# EAGLE board ScaleBreakoutBoard2.0 (EAGLE 9.6.2)
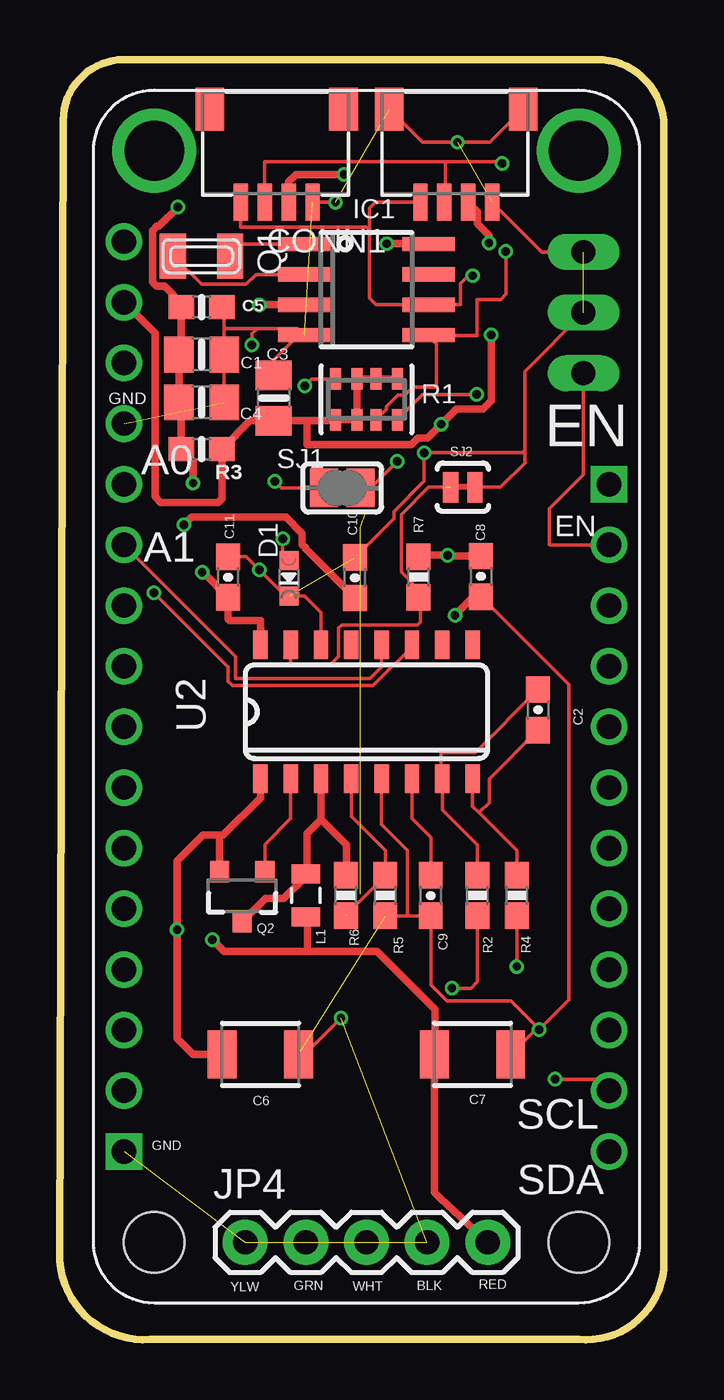
[diagram p0: board, top side]
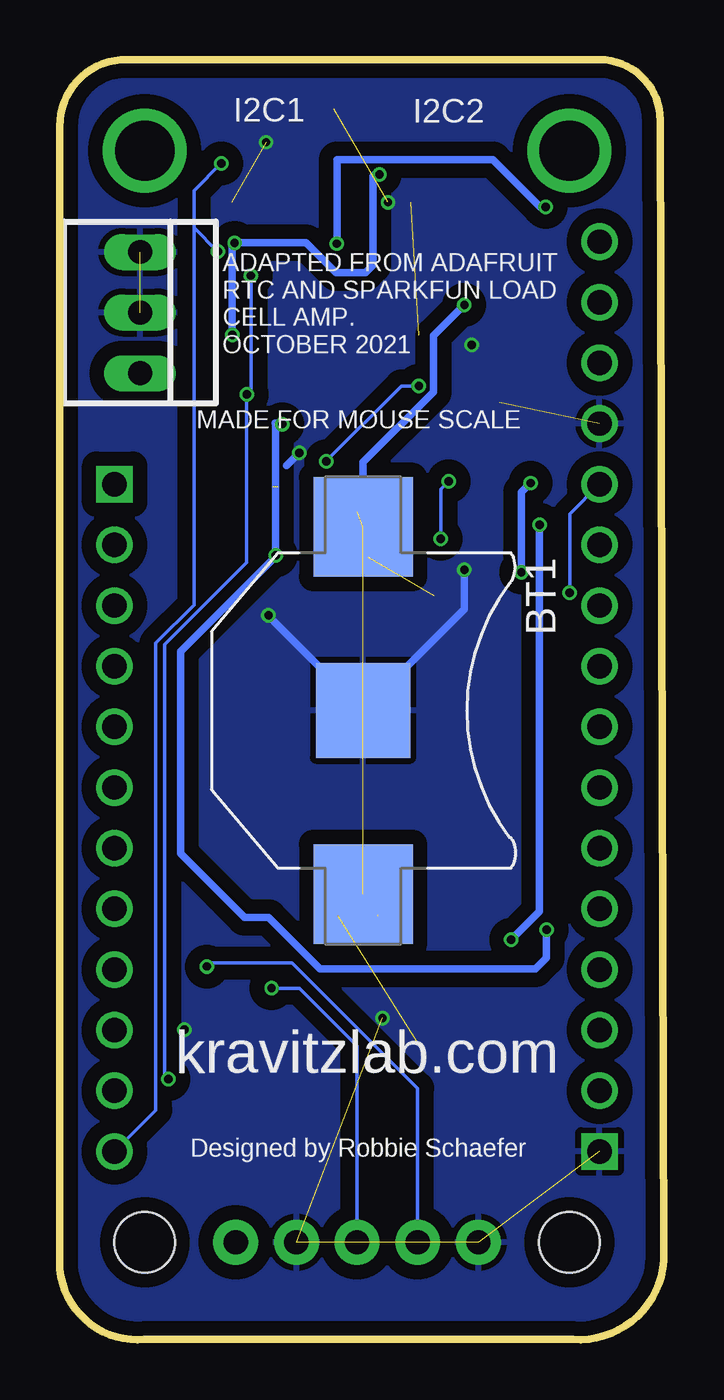
[diagram p1: board, bottom side, seen from below]

Size 25.31 x 53.61 mm. Coordinates in mm from the lower left corner, seen from the top.
Outline: 0.15,51.07 arc-90 2.69,53.61 22.76,53.61 arc-90 25.3,50.56 25.3,2.96 arc-90 21.74,0.01 3.81,0.01 arc-90 0,3.32 0.15,51.07
Copper layers (1*16): Top 0.035559375mm / dielectric 1.6mm / Bottom 0.035559375mm
Design rules "oshpark-2layer": minimum track width 6mil, minimum drill 10mil, track to track 6mil, track to pad 6mil, pad to pad 6mil, via to via 6mil, smd to smd 6mil, copper to edge 15mil, drill to drill 6mil, minimum pad ring 5mil, minimum via ring 5mil, stop-mask expansion 2.5mil, vias tented up to drill 0mil, thermal gap 10mil

## Footprints (pad centres in the part's own frame; a part is rotated, then mirrored left to right if it is on the bottom)
BAT_BK-885 = smd 3.96 x 3.96: - 0,0 | smd 4.17 x 4.17: S1+ -7.685,0; S2+ 7.685,0
0805-NO = smd 1.24 x 1.5: 1 -0.95,0; 2 0.95,0
0603-CAP = smd 1.1 x 1: 1 -0.85,0; 2 0.85,0
0603-NO = smd 1.075 x 1: 1 -0.85,0; 2 0.85,0
1210 = smd 1.2 x 2: 1 -1.6,0; 2 1.6,0
JST_SH4 = smd 0.6 x 1.55: 1 -1.5,2.514; 2 -0.5,2.514; 3 0.5,2.514; 4 1.5,2.514 | smd 1.2 x 1.8: MT1 -2.8,-1.386; MT2 2.8,-1.386
CHIPLED_0603_NOOUTLINE = smd 0.8 x 0.8: A 0,-0.75; C 0,0.75
SOIC8_150MIL = smd 0.6 x 2.2: 1 -1.905,-2.6; 2 -0.635,-2.6; 3 0.635,-2.6; 4 1.905,-2.6; 5 1.905,2.6; 6 0.635,2.6; 7 -0.635,2.6; 8 -1.905,2.6
1X05 = drill 1.016 pad 1.88: 1 0,0; 2 2.54,0; 3 5.08,0; 4 7.62,0; 5 10.16,0
0805 = smd 0.8 x 1.2: 1 -0.9,0; 2 0.9,0
XTAL3215 = smd 1.1 x 1.9: P$1 1.2,0; P$2 -1.2,0
SOT23-3 = smd 0.8 x 0.9: 1 -0.95,-1; 2 0.95,-1; 3 0,1.1
RESPACK_4X0603 = smd 0.45 x 0.9: 1 -1.3,-0.85; 2 -0.4,-0.85; 3 0.4,-0.85; 4 1.3,-0.85; 5 1.3,0.85; 6 0.4,0.85; 7 -0.4,0.85; 8 -1.3,0.85
0603-RES = smd 1.1 x 1: 1 -0.85,0; 2 0.85,0
SOLDERJUMPER_CLOSEDWIRE = smd 1.168 x 1.6: 1 -0.762,0; 2 0.762,0 | smd 0.635 x 0.203: WIRE 0,0
PAD-JUMPER-2-NC_BY_TRACE_YES_SILK = smd 0.635 x 1.27: 1 -0.508,0; 2 0.508,0
MODULE_FEATHER_M0_BASIC_PROTO = drill 1.02 square: P1_1 19.05,-10.16; P2_1 -8.89,10.16 | drill 1.02: P1_2 16.51,-10.16; P1_3 13.97,-10.16; P1_4 11.43,-10.16; P1_5 8.89,-10.16; P1_6 6.35,-10.16; P1_7 3.81,-10.16; P1_8 1.27,-10.16; P1_9 -1.27,-10.16; P1_10 -3.81,-10.16; P1_11 -6.35,-10.16; P1_12 -8.89,-10.16; P1_13 -11.43,-10.16; P1_14 -13.97,-10.16; P1_15 -16.51,-10.16; P1_16 -19.05,-10.16; P2_2 -6.35,10.16; P2_3 -3.81,10.16; P2_4 -1.27,10.16; P2_5 1.27,10.16; P2_6 3.81,10.16; P2_7 6.35,10.16; P2_8 8.89,10.16; P2_9 11.43,10.16; P2_10 13.97,10.16; P2_11 16.51,10.16; P2_12 19.05,10.16 | drill 2.5 pad 3.2: P$1 -22.86,8.89; P$2 -22.86,-8.89 | hole 2.54: 22.86,-8.89; 22.86,8.89
SO16 = smd 0.6 x 1.2: 1 -4.445,-2.8; 2 -3.175,-2.8; 3 -1.905,-2.8; 4 -0.635,-2.8; 5 0.635,-2.8; 6 1.905,-2.8; 7 3.175,-2.8; 8 4.445,-2.8; 9 4.445,2.8; 10 3.175,2.8; 11 1.905,2.8; 12 0.635,2.8; 13 -0.635,2.8; 14 -1.905,2.8; 15 -3.175,2.8; 16 -4.445,2.8
22-23-2031 = drill 1 long: 1 -2.54,0; 2 0,0; 3 2.54,0

## Placement (x,y rotation side)
BT1  BK-885  [BAT_BK-885]  12.6,26.35 270 bottom
C1  10uF  [0805-NO]  5.94,41.26 0 top
C2  0.1uF  [0603-CAP]  20.04,26.38 270 top
C3  10uF  [0805-NO]  8.97,39.44 90 top
C4  10uF  [0805-NO]  5.94,39.26 0 top
C5  0.1uF  [0603-NO]  5.94,43.25 0 top
C6  10uF  [1210]  8.41,11.95 0 top
C7  10uF  [1210]  17.3,11.95 0 top
C8  0.1uF  [0603-CAP]  17.65,31.97 270 top
C9  0.1uF  [0603-CAP]  15.54,18.61 90 top
C10  0.1uF  [0603-CAP]  12.37,31.92 90 top
C11  0.1uF  [0603-CAP]  7.06,31.94 90 top
CONN1  STEMMA_I2C_QT  [JST_SH4]  9.09,50.15 180 top
D1  GREEN  [CHIPLED_0603_NOOUTLINE]  9.6,31.89 180 top
I2C1  STEMMA_I2C_QT  [JST_SH4]  16.61,50.15 180 top
IC1  RTC_PCF8523T  [SOIC8_150MIL]  12.85,43.98 270 top
JP4  [1X05]  7.77,4.08 0 top
L1  3.3uH  [0805]  10.31,18.61 90 top
Q1  32.768  [XTAL3215]  5.94,45.38 0 top
Q2  MMBT4403  [SOT23-3]  7.65,18.61 180 top
R1  10K  [RESPACK_4X0603]  12.85,39.38 0 top
R2  100  [0603-RES]  17.5,18.61 90 top
R3  1K  [0603-NO]  5.94,37.3 180 top
R4  100  [0603-RES]  19.15,18.61 90 top
R5  8.2K  [0603-RES]  13.64,18.61 90 top
R6  20k  [0603-RES]  11.99,18.61 90 top
R7  10K  [0603-RES]  15.04,31.94 90 top
SJ1  [SOLDERJUMPER_CLOSEDWIRE]  11.84,35.68 0 top
SJ2  [PAD-JUMPER-2-NC_BY_TRACE_YES_SILK]  16.89,35.7 180 top
U1  FEATHER_M0_BASIC_PROTO  [MODULE_FEATHER_M0_BASIC_PROTO]  12.85,26.94 270 top
U2  HX711  [SO16]  12.85,26.3 0 top
X1  22-23-2031  [22-23-2031]  21.95,43.02 270 bottom

## Library data of the parts
BT1 = BK-885; AVAILABILITY: In Stock; DESCRIPTION: BATTERY RETAINER COIN 12MM SMD; MF: MPD; MP: BK-885; PACKAGE: None; PRICE: None; PURCHASE-URL: https://pricing.snapeda.com/search/part/BK-885/?ref=eda
C1 C3-C5 CONN1 D1 I2C1 IC1 Q1 R1 R3 SJ1 = microbuilder
C2 C8-C11 = SparkFun-Capacitors; PROD_ID: CAP-08604
C6 C7 = SparkFun-Capacitors; PROD_ID: CAP-09824
JP4 = SparkFun-Connectors
L1 = SparkFun-Passives; PROD_ID: NDUC-13076
Q2 = SparkFun-DiscreteSemi; PROD_ID: TRANS-09245
R2 R4 = SparkFun-Resistors; PROD_ID: RES-07863
R5 = SparkFun-Resistors; PROD_ID: RES-10646
R6 = SparkFun-Resistors; PROD_ID: RES-09383
R7 = SparkFun-Resistors; PROD_ID: RES-00824
SJ2 = SparkFun-Passives
U1 = FEATHER_M0_BASIC_PROTO; AVAILABILITY: No availability data; DESCRIPTION: ATSAMD21G18 Feather M0 Basic Proto SAM D ARM® Cortex®-M0+ MCU 32-Bit Embedded Evaluation Board; MF: Adafruit Industries; MP: Feather M0 Basic Proto; PACKAGE: Package; PRICE: None
U2 = Testing; PROD_ID: IC-12445
X1 = con-molex; MF: MOLEX; MPN: 22-23-2031; OC_FARNELL: 1462950; OC_NEWARK: 30C0862

## Nets
A0: U1.P1_12 U2.11
A1: U1.P1_11 U2.12
A+: JP4.2 R4.1
A-: JP4.3 R2.1
AVDD: C7.1 C10.1 JP4.5 L1.1
B+: U2.10
B-: U2.9
EN: U1.P2_2 X1.3
GND: BT1.- C1.2 C3.2 C4.2 C5.2 C6.2 C7.2 C8.2 C9.1 C10.2 C11.2 CONN1.1 D1.C I2C1.1 I2C1.MT1 I2C1.MT2 IC1.4 JP4.1 JP4.4 R5.1 SJ2.1 U1.P1_1 U1.P1_13 U2.5 U2.14 X1.1 X1.2
N$1: R1.8 SJ1.2
N$2: Q2.1 U2.2
N$3: R7.1 SJ2.2 U2.15
N$4: D1.A SJ1.1
N$5: L1.2 Q2.3 R6.2 U2.3
N$6: R5.2 R6.1 U2.4
N$7: C9.2 U2.6
N$8: C2.1 R2.2 U2.7
N$9: C2.2 R4.2 U2.8
N$14: IC1.1 Q1.P$1
N$15: IC1.2 Q1.P$2
SCL: CONN1.4 I2C1.4 IC1.6 R1.4 U1.P2_11
SDA: CONN1.3 I2C1.3 IC1.5 R1.3 U1.P2_12
SQW: IC1.7
VBAT: U1.P2_1
VBAT1: BT1.S1+ BT1.S2+ IC1.3
VBUS: U1.P2_3
VCC: C3.1 C6.1 C8.1 CONN1.2 I2C1.2 Q2.2 R1.1 R1.2 R1.5 R1.6 R1.7 R3.1 R7.2 U1.P1_15 U2.1
VDD: C1.1 C4.1 C5.1 C11.1 IC1.8 R3.2 U2.16

## Tracks (layer width: path | path; a pad name or v marks a point on that pad's centre or on a via)
A0  (via drill 0.35)
  Top 0.152: v3.94,31.29 7.06,28.17 7.06,27.57 7.24,27.4 13.13,27.4 14.76,29.02 U2.11
  Bottom 0.152: v3.94,31.29 3.94,34.58 U1.P1_12
A1
  Top 0.152: U1.P1_11 7.37,28.61 7.37,27.7 13,27.7 13.49,28.18 U2.12
A+  (via drill 0.35)
  Top 0.152: R4.1 19.18,17.68 19.15,17.66 v19.15,15.64
  Bottom 0.152: JP4.2 10.31,10.53 15.57,15.79 19,15.79 v19.15,15.64
A-  (via drill 0.35)
  Top 0.152: v16.43,14.72 17.22,14.72 17.5,15 R2.1
  Bottom 0.152: JP4.3 12.85,12.31 15.27,14.72 v16.43,14.72
AVDD  (via drill 0.35)
  Top 0.305: v5.21,34.13 5.53,34.45 9.48,34.45 10.16,33.77 10.16,33.31 10.31,33.17 10.31,33.13 C10.1 | JP4.5 15.95,5.93 15.7,6.19 15.7,11.72 | C7.1 15.7,11.72 | v6.4,16.75 6.88,16.27 10.39,16.27 | 10.39,16.27 10.39,17.63 L1.1 | 10.39,16.27 13.28,16.27 15.72,13.83 15.72,11.75 15.7,11.72
  Bottom 0.305: v5.21,34.13 5.21,17.95 v6.4,16.75
EN
  Top 0.152: U1.P2_2 20.55,33.29 20.52,33.31 20.52,34.81 21.95,36.23 X1.3
GND  (via drill 0.35)  (10 unrouted)
  Top 0.152: 6.87,43.27 C5.2 6.89,43.2 6.89,42.36 | 17.87,31.33 C8.2 17.74,31.03 21.34,27.43 21.34,14.24 v20.09,12.99 | C10.2 14,34.4 14,34.69 15.27,35.95 v15.27,37.15 19.38,37.15 19.48,37.25 | C11.2 7.81,32.79 v8.36,32.25 9.46,31.14 D1.C 10.26,31.14 10.95,30.46 U2.14 | SJ2.1 18.47,35.7 19.48,36.72 | 6.89,42.36 C1.2 C4.2 | R5.1 14.58,17.76 | 14.58,17.76 C9.1 15.54,14.86 16.21,14.19 18.89,14.19 v20.09,12.99 | U2.5 13.49,21.58 14.58,20.49 14.58,17.76 | C7.2 19.94,12.99 v20.09,12.99 | IC1.4 10.13,42.2 | 10.13,42.2 9.97,42.36 8.28,42.36 | 8.28,42.36 6.89,42.36 | C3.2 8.97,41.04 10.13,42.2 | 8.28,42.36 8.05,42.13 v8.05,41.67 | C6.2 10.26,11.95 v11.79,13.48 | 19.48,36.72 19.51,36.74 | CONN1.1 v11.56,47.64 | I2C1.1 20.2,45.56 X1.1 | 19.48,36.72 19.48,37.25 | 19.48,37.25 19.48,40.55 X1.2 | I2C1.MT1 18.03,50.15 v16.66,50.15 15.2,50.15 I2C1.MT2
  Top 0.305: v16.56,30.34 17.25,31.03 17.74,31.03
  Bottom 0.305: 15.8,36.62 v15.27,37.15 | v8.36,32.25 8.36,30.6 BT1.- 16.56,30.32 v16.56,30.34
  pour Bottom (isolate 0.61): -12.55,59.96 -8.74,63.77 71.27,63.77 77.62,57.42 77.62,-3.54 70,-11.16 -4.93,-11.16 -12.55,-3.54
N$1  (via drill 0.35)
  Top 0.152: R1.8 10.55,40.23 v10.26,39.94 | v14.15,36.79 13.03,35.68 SJ1.2
  Bottom 0.152: v10.26,39.94 11,39.94 v14.15,36.79
N$2
  Top 0.152: U2.2 9.68,21.83 8.6,20.75 Q2.1
N$3  (1 unrouted)
  Top 0.152: U2.15 9.68,28.23 11.3,28.23 11.69,28.62 11.69,29.8 11.82,29.93 14.98,29.93 15.11,30.06 15.11,31.02 R7.1 15.04,31.42 14.31,32.15 14.31,34.57 15.44,35.7 16.15,35.7
N$4  (via drill 0.35)
  Top 0.152: D1.A 9.35,32.9 v9.35,33.54 | SJ1.1 9.3,35.68 v9.02,35.96
  Bottom 0.152: v9.02,35.96 9.35,35.63 v9.35,33.54
N$5
  Top 0.152: 10.36,19.46 L1.2
  Top 0.305: U2.3 10.95,21.78 | 10.36,19.46 10.36,21.2 10.95,21.78 | 10.95,21.78 12.01,20.72 12.01,19.48 R6.2 | 10.04,19.46 10.36,19.46 | Q2.3 8.62,18.48 9.39,18.48 10.36,19.46
N$6  (1 unrouted)
  Top 0.152: U2.4 12.22,21.91 13.64,20.49 R5.2 13.64,19.45 11.99,17.79
N$7
  Top 0.152: C9.2 15.54,21.05 14.76,21.83 U2.6
N$8
  Top 0.152: C2.1 17.41,24.6 15.98,24.6 15.98,23.36 16.03,23.31 U2.7 16.03,22.19 17.5,20.72 R2.2
N$9
  Top 0.152: C2.2 18,23.48 18,22.51 17.56,22.07 | U2.8 17.3,22.34 17.56,22.07 | R4.2 19.15,20.49 17.56,22.07
N$14
  Top 0.152: Q1.P$1 7.68,45.89 IC1.1
N$15
  Top 0.152: IC1.2 8.23,44.62 7.81,44.2 5.95,44.2 Q1.P$2
SCL  (via drill 0.35)
  Top 0.152: v20.75,10.91 22.53,10.91 U1.P2_11 | v17.3,44.57 17.12,44.57 16.78,44.23 16.78,43.35 IC1.6 13.24,43.35 12.98,43.61 12.98,46.47 | R1.4 15.21,39.59 v17.48,39.59 | 12.98,46.47 12.98,47.39 13.23,47.64 I2C1.4 | 12.98,46.47 12.85,46.6 7.57,46.6 7.57,47.62 CONN1.4
  Bottom 0.152: v17.3,44.57 17.3,39.77 v17.48,39.59 17.48,32.55 20.9,29.12 20.9,11.06 v20.75,10.91
SDA  (via drill 0.35)
  Top 0.152: 15.44,42.04 IC1.5 | 15.44,42.04 17.48,42.04 17.48,43.57 18.47,43.57 18.69,43.78 v18.69,45.57 | R1.3 13.7,38.98 13.7,39.08 14.18,39.56 14.47,39.56 14.81,39.89 15.77,39.89 15.77,41.71 15.44,42.04 | I2C1.3 16.15,47.68 16.15,49.33 | v18.54,49.27 18.48,49.33 16.15,49.33 | 16.15,49.33 8.59,49.33 CONN1.3
  Bottom 0.152: U1.P2_12 21.29,9.62 21.29,29.17 19.68,30.78 19.68,46.56 | v18.69,45.57 19.68,46.56 | 19.68,46.56 19.68,48.13 v18.54,49.27
VBAT1  (via drill 0.35)  (2 unrouted)
  Top 0.305: IC1.3 v8.36,43.35
  Bottom 0.305: 11.86,34.88 12.84,34.66 | v8.36,43.35 9.65,42.05 9.65,39.69 12.6,36.75 BT1.S1+
VCC  (via drill 0.35)
  Top 0.305: R7.2 15.1,32.86 v16.26,32.86 16.3,32.82 C8.1 | C6.1 5.59,11.95 4.92,12.62 v4.92,17.17 4.92,20.04 6.01,21.14 6.68,21.14 | U2.1 8.41,22.7 6.85,21.14 6.68,21.14 | C3.1 | C3.1 10.36,38.49 | 10.36,38.49 11.5,38.49 R1.1 R1.2 12.45,40.27 12.42,40.3 R1.7 R1.6 R1.5 | 10.36,38.49 10.36,37.48 14.74,37.48 15.01,37.76 15.4,37.76 v15.99,38.35 16.62,38.98 17.73,38.98 18.08,39.34 v18.08,42.08 | U1.P1_15 3.99,42.15 3.99,35.31 4.23,35.07 6.63,35.07 6.79,35.23 R3.1 | 6.65,37.16 R3.1 | I2C1.2 17.51,47.24 17.51,46.74 17.98,46.26 v17.98,45.94 | v11.91,48.8 9.9,48.8 9.59,48.5 CONN1.2 | C3.1 7.98,38.49 R3.1 | 6.68,21.14 6.7,21.12 Q2.2
  Bottom 0.305: v15.99,38.35 16.04,38.39 16.28,38.39 16.26,38.37 v16.26,32.86 16.26,32.81 20.24,28.82 20.24,20.36 17.57,17.69 16.56,17.69 14.41,15.53 5.38,15.53 4.92,16 v4.92,17.17 | v18.08,42.08 18.08,45.84 v17.98,45.94 14.99,45.94 13.74,44.69 12.5,44.69 12.19,45 12.19,48.73 12.12,48.8 v11.91,48.8
VDD  (via drill 0.35)
  Top 0.305: C4.1 5.04,39.23 | U2.16 8.41,30.13 7.11,30.13 7.06,30.18 C11.1 6.01,32.15 v5.97,32.15 | 15.48,45.86 IC1.8 15.43,45.91 v13.7,45.91 | v4.95,47.44 4.15,46.63 4.07,46.63 3.89,46.46 3.89,44.3 4.07,44.12 4.39,44.12 5.18,43.33 C5.1 5.09,41.36 C1.1 C4.1 | C4.1 5.09,39.16 R3.2 5.59,36.81 v5.59,35.88
  Bottom 0.305: v4.95,47.44 5.18,47.44 7.16,49.42 13.69,49.42 13.69,45.91 v13.7,45.91 | v5.59,35.88 5.97,35.5 v5.97,32.15

## Text on the board
tNames: GND | EN | A0 | EN | A1 | SCL | GND | SDA | YLW | GRN | WHT | BLK | RED
bNames: I2C2 | ADAPTED FROM ADAFRUIT / RTC AND SPARKFUN LOAD / CELL AMP. / OCTOBER 2021 | MADE FOR MOUSE SCALE | kravitzlab.com | Designed by Robbie Schaefer